# EAGLE board CT_schematic (EAGLE 7.6.0)

Size 100 x 80 mm. Coordinates in mm from the lower left corner, seen from the top.
Outline: 0,0 100,0 100,80 0,80 0,0
Copper layers (1*16): Top 0.035mm / dielectric 1.5mm / Bottom 0.035mm
Design rules "default": minimum track width 10mil, minimum drill 24mil, track to track 8mil, track to pad 8mil, pad to pad 8mil, via to via 8mil, smd to smd 8mil, copper to edge 40mil, drill to drill 8mil, minimum pad ring 10mil, minimum via ring 8mil, stop-mask expansion 4mil, vias tented up to drill 0mil, thermal gap 10mil

## Footprints (pad centres in the part's own frame; a part is rotated, then mirrored left to right if it is on the bottom)
C0603 = smd 0.8 x 0.8: 1 -0.762,0; 2 0.762,0
C0402 = smd 0.5 x 0.5: 1 -0.508,0; 2 0.508,0
EXV-9B = smd 2.718 x 1.778: 1 -2.108,0; 2 2.108,0
EXV-9H = smd 3.505 x 1.676: 1 -2.857,0; 2 2.857,0
L0603 = smd 0.8 x 0.8: 1 -0.762,0; 2 0.762,0
PJ-037B_PACKAGE = drill 3.7 square: 1 12,0 | drill 3.2 square: 2 6,0
R0603 = smd 0.8 x 0.8: 1 -0.762,0; 2 0.762,0
LQFP64 = smd 0.3 x 1.2: 1 -3.75,-5.75; 2 -3.25,-5.75; 3 -2.75,-5.75; 4 -2.25,-5.75; 5 -1.75,-5.75; 6 -1.25,-5.75; 7 -0.75,-5.75; 8 -0.25,-5.75; 9 0.25,-5.75; 10 0.75,-5.75; 11 1.25,-5.75; 12 1.75,-5.75; 13 2.25,-5.75; 14 2.75,-5.75; 15 3.25,-5.75; 16 3.75,-5.75; 33 3.75,5.75; 34 3.25,5.75; 35 2.75,5.75; 36 2.25,5.75; 37 1.75,5.75; 38 1.25,5.75; 39 0.75,5.75; 40 0.25,5.75; 41 -0.25,5.75; 42 -0.75,5.75; 43 -1.25,5.75; 44 -1.75,5.75; 45 -2.25,5.75; 46 -2.75,5.75; 47 -3.25,5.75; 48 -3.75,5.75 | smd 1.2 x 0.3: 17 5.75,-3.75; 18 5.75,-3.25; 19 5.75,-2.75; 20 5.75,-2.25; 21 5.75,-1.75; 22 5.75,-1.25; 23 5.75,-0.75; 24 5.75,-0.25; 25 5.75,0.25; 26 5.75,0.75; 27 5.75,1.25; 28 5.75,1.75; 29 5.75,2.25; 30 5.75,2.75; 31 5.75,3.25; 32 5.75,3.75; 49 -5.75,3.75; 50 -5.75,3.25; 51 -5.75,2.75; 52 -5.75,2.25; 53 -5.75,1.75; 54 -5.75,1.25; 55 -5.75,0.75; 56 -5.75,0.25; 57 -5.75,-0.25; 58 -5.75,-0.75; 59 -5.75,-1.25; 60 -5.75,-1.75; 61 -5.75,-2.25; 62 -5.75,-2.75; 63 -5.75,-3.25; 64 -5.75,-3.75
TSSOP20-I = smd 0.4 x 1.35: 1 -2.925,-2.875; 2 -2.275,-2.875; 3 -1.625,-2.875; 4 -0.975,-2.875; 5 -0.325,-2.875; 6 0.325,-2.875; 7 0.975,-2.875; 8 1.625,-2.875; 9 2.275,-2.875; 10 2.925,-2.875; 11 2.925,2.875; 12 2.275,2.875; 13 1.625,2.875; 14 0.975,2.875; 15 0.325,2.875; 16 -0.325,2.875; 17 -0.975,2.875; 18 -1.625,2.875; 19 -2.275,2.875; 20 -2.925,2.875
182-009-MALE = drill 1.194 pad 1.524 octagon: 1 -5.537,10.923; 2 -2.769,10.923; 3 0,10.923; 4 2.769,10.923; 5 5.537,10.923; 6 -4.153,8.08; 7 -1.384,8.08; 8 1.384,8.08; 9 4.153,8.08 | hole 3.048: -12.446,9.501; 12.446,9.501
SSOP-28 = smd 1.5 x 0.4: 1 -3.625,4.225; 2 -3.625,3.575; 3 -3.625,2.925; 4 -3.625,2.275; 5 -3.625,1.625; 6 -3.625,0.975; 7 -3.625,0.325; 8 -3.625,-0.325; 9 -3.625,-0.975; 10 -3.625,-1.625; 11 -3.625,-2.275; 12 -3.625,-2.925; 13 -3.625,-3.575; 14 -3.625,-4.225; 15 3.625,-4.225; 16 3.625,-3.575; 17 3.625,-2.925; 18 3.625,-2.275; 19 3.625,-1.625; 20 3.625,-0.975; 21 3.625,-0.325; 22 3.625,0.325; 23 3.625,0.975; 24 3.625,1.625; 25 3.625,2.275; 26 3.625,2.925; 27 3.625,3.575; 28 3.625,4.225
HTSS-105-01-G-D = drill 1 pad 1.8 square: 1 0,0 | drill 1 pad 1.8: 2 0,2.54; 3 2.54,0; 4 2.54,2.54; 5 5.08,0; 6 5.08,2.54; 7 7.62,0; 8 7.62,2.54; 9 10.16,0; 10 10.16,2.54
ASEK = smd 1.4 x 1: 1 -1.1,-0.8; 2 1.1,-0.8; 3 1.1,0.8; 4 -1.1,0.8
ASFL1 = smd 1.7 x 1.5: 1 -1.27,-1.1; 2 1.27,-1.1; 3 1.27,1.1; 4 -1.27,1.1
LP2954 = smd 1.6 x 0.6: 1 -2.475,1.905 | smd 1.55 x 0.6: 2 -2.475,0.635; 3 -2.475,-0.635; 4 -2.475,-1.905; 5 2.475,-1.905; 6 2.475,-0.635; 7 2.475,0.635; 8 2.475,1.905
SON-6 = smd 0.55 x 0.3: 1 -0.355,0.5 | smd 0.52 x 0.3: 2 -0.37,0; 3 -0.37,-0.5; 4 0.37,-0.5; 5 0.37,0; 6 0.37,0.5
SW_4-1437565-2 = smd 1.4 x 2.1: 1 -2.23,4.55; 2 -2.23,-4.55; 3 2.23,4.55; 4 2.23,-4.55
LGM67K-G1J2-24-Z = smd 0.8 x 1.4: A -2,0; C 0,0
NC7SZ125M5X = smd 1.3 x 0.7: 1 -1.3,0.95; 2 -1.3,0; 3 -1.3,-0.95; 4 1.3,-0.95; 5 1.3,0.95

## Placement (x,y rotation side)
C1  1e-07  [C0603]  -48.26,66.04 0 top  (outside the outline)
C2  1e-07  [C0603]  -52.07,66.04 0 top  (outside the outline)
C3  1e-07  [C0603]  -55.88,66.04 0 top  (outside the outline)
C4  1e-07  [C0603]  -59.69,66.04 0 top  (outside the outline)
C5  4.7e-06  [C0603]  -44.45,66.04 0 top  (outside the outline)
C6  1e-08  [C0603]  -63.5,66.04 0 top  (outside the outline)
C7  1e-06  [C0603]  -67.31,66.04 0 top  (outside the outline)
C8  1e-07  [C0603]  -71.12,66.04 0 top  (outside the outline)
C9  1e-07  [C0402]  -30.48,71.12 0 top  (outside the outline)
C10  1e-07  [C0402]  -34.29,71.12 0 top  (outside the outline)
C11  1e-07  [C0402]  -38.1,71.12 0 top  (outside the outline)
C12  1e-07  [C0402]  -41.91,71.12 0 top  (outside the outline)
C13  1e-07  [C0402]  -45.72,71.12 0 top  (outside the outline)
C14  1e-07  [C0402]  -49.53,71.12 0 top  (outside the outline)
C15  1e-07  [C0402]  -53.34,71.12 0 top  (outside the outline)
C16  1e-07  [C0402]  -57.15,71.12 0 top  (outside the outline)
C17  1e-07  [C0402]  -60.96,71.12 0 top  (outside the outline)
C18  1e-07  [C0402]  -64.77,71.12 0 top  (outside the outline)
C19  1e-07  [C0402]  -68.58,71.12 0 top  (outside the outline)
C20  1e-08  [C0402]  -15.24,76.2 0 top  (outside the outline)
C21  1e-08  [C0402]  -19.05,76.2 0 top  (outside the outline)
C22  1e-06  [EXV-9B]  -30.48,59.69 0 top  (outside the outline)
C23  2.2e-06  [EXV-9B]  -39.37,59.69 0 top  (outside the outline)
C24  1e-07  [C0402]  -22.86,76.2 0 top  (outside the outline)
C25  0.0001  [EXV-9H]  -55.88,52.07 0 top  (outside the outline)
C26  0.0001  [EXV-9H]  -67.31,52.07 0 top  (outside the outline)
C27  1e-08  [C0402]  -26.67,76.2 0 top  (outside the outline)
F1  240.0  [L0603]  -15.24,71.12 0 top  (outside the outline)
J1  PJ-037B  [PJ-037B_PACKAGE]  -27.94,29.21 0 top  (outside the outline)
R2  1000.0  [R0603]  -19.05,71.12 0 top  (outside the outline)
R4  4700.0  [R0603]  -22.86,71.12 0 top  (outside the outline)
R5  10000.0  [R0603]  -30.48,66.04 0 top  (outside the outline)
R6  100000.0  [R0603]  -59.69,58.42 0 top  (outside the outline)
R7  100000.0  [R0603]  -64.77,58.42 0 top  (outside the outline)
R8  100000.0  [R0603]  -69.85,58.42 0 top  (outside the outline)
R9  164658.62  [R0603]  -54.61,58.42 0 top  (outside the outline)
R10  100000.0  [R0603]  -15.24,66.04 0 top  (outside the outline)
R11  10000.0  [R0603]  -35.56,66.04 0 top  (outside the outline)
R12  10000.0  [R0603]  -40.64,66.04 0 top  (outside the outline)
R13  9100.0  [R0603]  -26.67,71.12 0 top  (outside the outline)
R14  680000.0  [R0603]  -20.32,66.04 0 top  (outside the outline)
R15  120000.0  [R0603]  -25.4,66.04 0 top  (outside the outline)
U1  STM32L072RZT6  [LQFP64]  -40.64,29.21 0 top  (outside the outline)
U2  SP3203ECY-L/TR  [TSSOP20-I]  -24.13,41.91 0 top  (outside the outline)
U3  182-009-113R531  [182-009-MALE]  -36.83,6.35 0 top  (outside the outline)
U4  ST3241EBPR  [SSOP-28]  -58.42,7.62 0 top  (outside the outline)
U5  HTSS-105-01-G-D  [HTSS-105-01-G-D]  -43.18,40.64 0 top  (outside the outline)
U6  ASEK-32.768KHz-ECST  [ASEK]  -46.99,52.07 0 top  (outside the outline)
U7  ASFL1-25MHZ-NCS  [ASFL1]  -26.67,52.07 0 top  (outside the outline)
U8  LP2954AIMX/NOPB  [LP2954]  -58.42,40.64 0 top  (outside the outline)
U9  TPS3895ADRYR  [SON-6]  -29.21,74.93 0 top  (outside the outline)
U10  4-1437565-2  [SW_4-1437565-2]  -62.23,27.94 0 top  (outside the outline)
U11  Q65110A2395  [LGM67K-G1J2-24-Z]  -17.78,59.69 0 top  (outside the outline)
U12  nc7sz125m5x  [NC7SZ125M5X]  -46.99,58.42 0 top  (outside the outline)

## Library data of the parts
C1-C27 F1 J1 R2 R4-R15 U1-U12 = circuit_tree

## Nets
CLK_U1_3: U1.3 U6.3
CLK_U1_5: U1.5 U7.3
GND: C1.2 C2.2 C3.2 C4.2 C5.2 C6.2 C7.2 C8.2 C9.2 C10.2 C13.2 C14.2 C15.2 C18.2 C19.2 C20.2 C21.2 C22.2 C23.2 C24.2 C25.2 C26.2 C27.2 J1.2 R2.2 R5.2 R10.2 R13.2 R15.2 U1.12 U1.18 U1.31 U1.47 U1.63 U2.18 U3.5 U4.23 U4.25 U5.9 U6.2 U7.2 U8.4 U9.2 U11.C U12.1 U12.3
NET_U1_7: R4.1 U1.7 U12.4
NET_U1_13: C6.1 C7.1 F1.1 U1.13
NET_U1_60: R5.1 U1.60
NET_U1_61: U11.A
NET_U1_62: U10.3 U10.4
NET_U2_1: C11.1 U2.1
NET_U2_2: C13.1 U2.2
NET_U2_3: C11.2 U2.3
NET_U2_4: C12.1 U2.4
NET_U2_5: C12.2 U2.5
NET_U2_6: C14.1 U2.6
NET_U2_20: U2.20
NET_U3_2: U2.14 U3.2
NET_U3_3: U2.17 U3.3
NET_U3_7: U2.13 U3.7
NET_U3_8: U2.16 U3.8
NET_U4_1: C17.1 U4.1
NET_U4_2: C17.2 U4.2
NET_U4_3: C19.1 U4.3
NET_U4_22: R6.1 U4.22
NET_U4_24: C16.2 U4.24
NET_U4_27: C18.1 U4.27
NET_U4_28: C16.1 U4.28
NET_U5_3: U4.4 U5.3
NET_U5_4: U4.5 U5.4
NET_U5_5: U4.9 U5.5
NET_U5_6: U4.10 U5.6
NET_U8_3: R8.1 U8.3
NET_U8_5: R7.1 U8.5
NET_U8_7: R9.2 R10.1 U8.7
NET_U9_1: R12.1 R13.1 U9.1
NET_U9_3: R14.2 R15.1 U9.3
NET_U9_4: R11.1 U9.4 U12.2
NET_U10_1: R2.1 U10.1 U10.2
PROC_LPUART1_CTS: U1.22 U2.8
PROC_LPUART1_RTS: U1.27 U2.10
PROC_LPUART1_RX: U1.8 U2.11
PROC_LPUART1_TX: U1.9 U2.7
PROC_USART1_CTS: U1.44 U4.13
PROC_USART1_RTS: U1.45 U4.18
PROC_USART1_RX: U1.43 U4.19
PROC_USART1_TX: U1.42 U4.14
VCC_S1_6V2: C22.1 C25.1 C26.1 J1.1 R8.2 U8.8
VCC_TIER1_3V3: C1.1 C2.1 C3.1 C4.1 C5.1 C8.1 C9.1 C10.1 C15.1 C20.1 C21.1 C23.1 C24.1 C27.1 F1.2 R4.2 R6.2 R7.2 R9.1 R11.2 R12.2 R14.1 U1.1 U1.19 U1.32 U1.48 U1.64 U2.12 U2.19 U4.26 U6.4 U7.4 U8.1 U9.6 U12.5

## Tracks (layer width: path | path; a pad name or v marks a point on that pad's centre or on a via)
CLK_U1_3  (1 unrouted)
CLK_U1_5  (1 unrouted)
GND  (45 unrouted)
NET_U1_7  (2 unrouted)
NET_U1_13  (3 unrouted)
NET_U1_60  (1 unrouted)
NET_U1_62  (1 unrouted)
NET_U2_1  (1 unrouted)
NET_U2_2  (1 unrouted)
NET_U2_3  (1 unrouted)
NET_U2_4  (1 unrouted)
NET_U2_5  (1 unrouted)
NET_U2_6  (1 unrouted)
NET_U3_2  (1 unrouted)
NET_U3_3  (1 unrouted)
NET_U3_7  (1 unrouted)
NET_U3_8  (1 unrouted)
NET_U4_1  (1 unrouted)
NET_U4_2  (1 unrouted)
NET_U4_3  (1 unrouted)
NET_U4_22  (1 unrouted)
NET_U4_24  (1 unrouted)
NET_U4_27  (1 unrouted)
NET_U4_28  (1 unrouted)
NET_U5_3  (1 unrouted)
NET_U5_4  (1 unrouted)
NET_U5_5  (1 unrouted)
NET_U5_6  (1 unrouted)
NET_U8_3  (1 unrouted)
NET_U8_5  (1 unrouted)
NET_U8_7  (2 unrouted)
NET_U9_1  (2 unrouted)
NET_U9_3  (2 unrouted)
NET_U9_4  (2 unrouted)
NET_U10_1  (2 unrouted)
PROC_LPUART1_CTS  (1 unrouted)
PROC_LPUART1_RTS  (1 unrouted)
PROC_LPUART1_RX  (1 unrouted)
PROC_LPUART1_TX  (1 unrouted)
PROC_USART1_CTS  (1 unrouted)
PROC_USART1_RTS  (1 unrouted)
PROC_USART1_RX  (1 unrouted)
PROC_USART1_TX  (1 unrouted)
VCC_S1_6V2  (5 unrouted)
VCC_TIER1_3V3  (34 unrouted)